# Altium PCB PCB.PcbDoc
Units mm, origin at the board's own origin, x right, y up, seen from the top; angles counter-clockwise.
Board outline 152.4 x 101.6 mm, 2 copper layers (Top Layer, Bottom Layer); 14 components, 15 nets, 57 pads, 0 vias.
Unrouted connection lines stored in the file: 32.
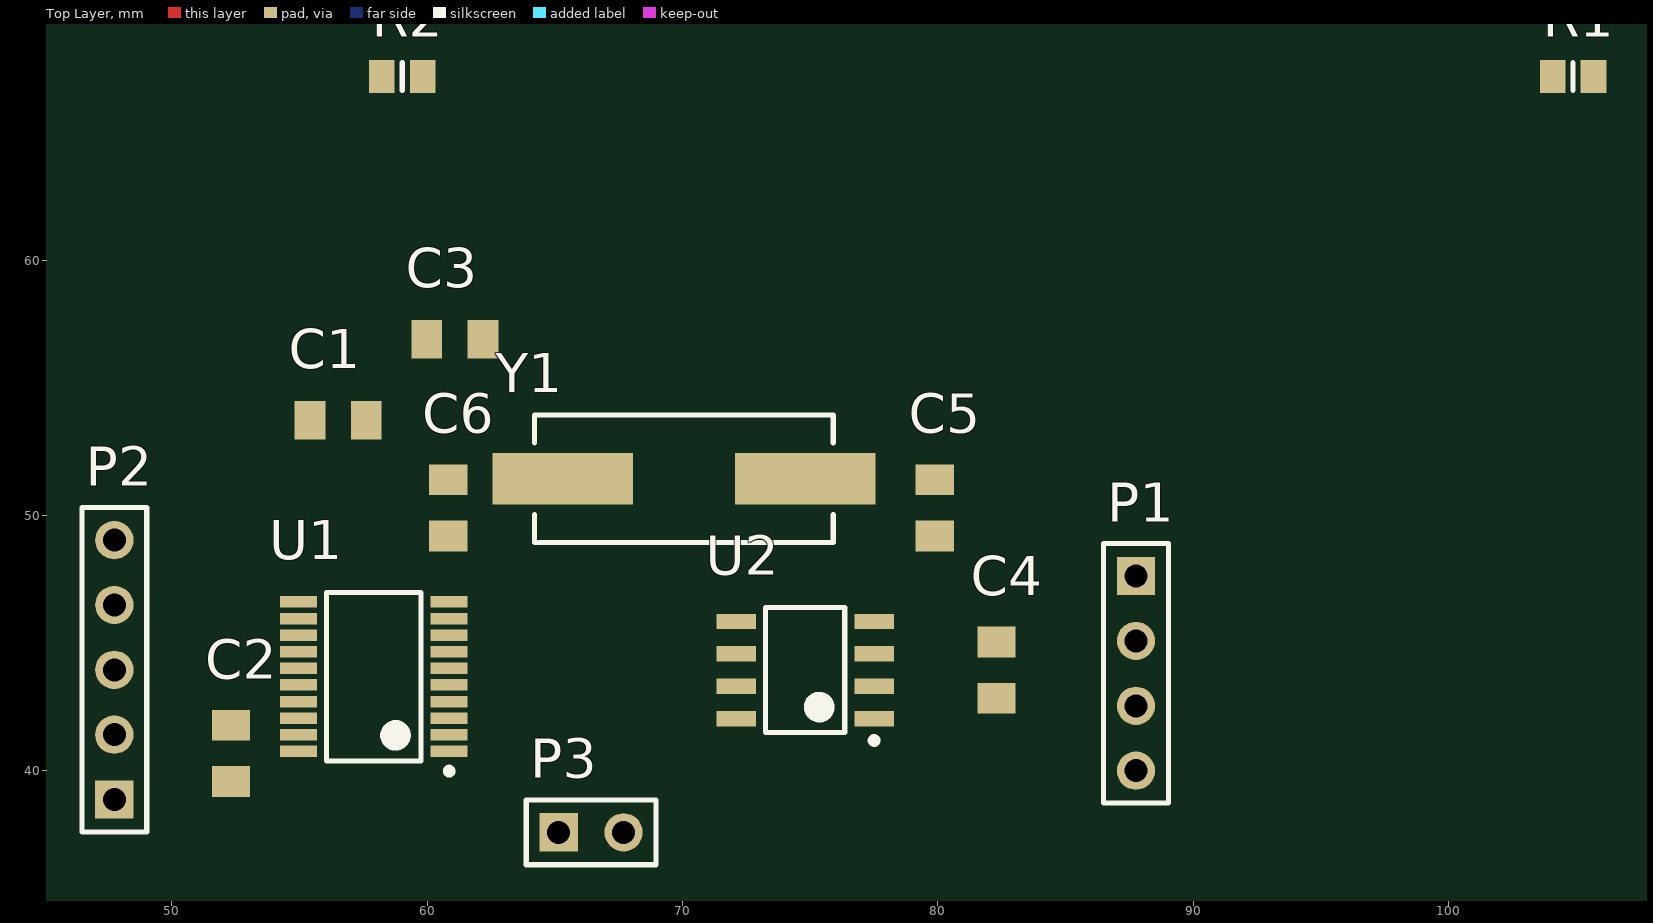
[diagram p0: Top Layer view]
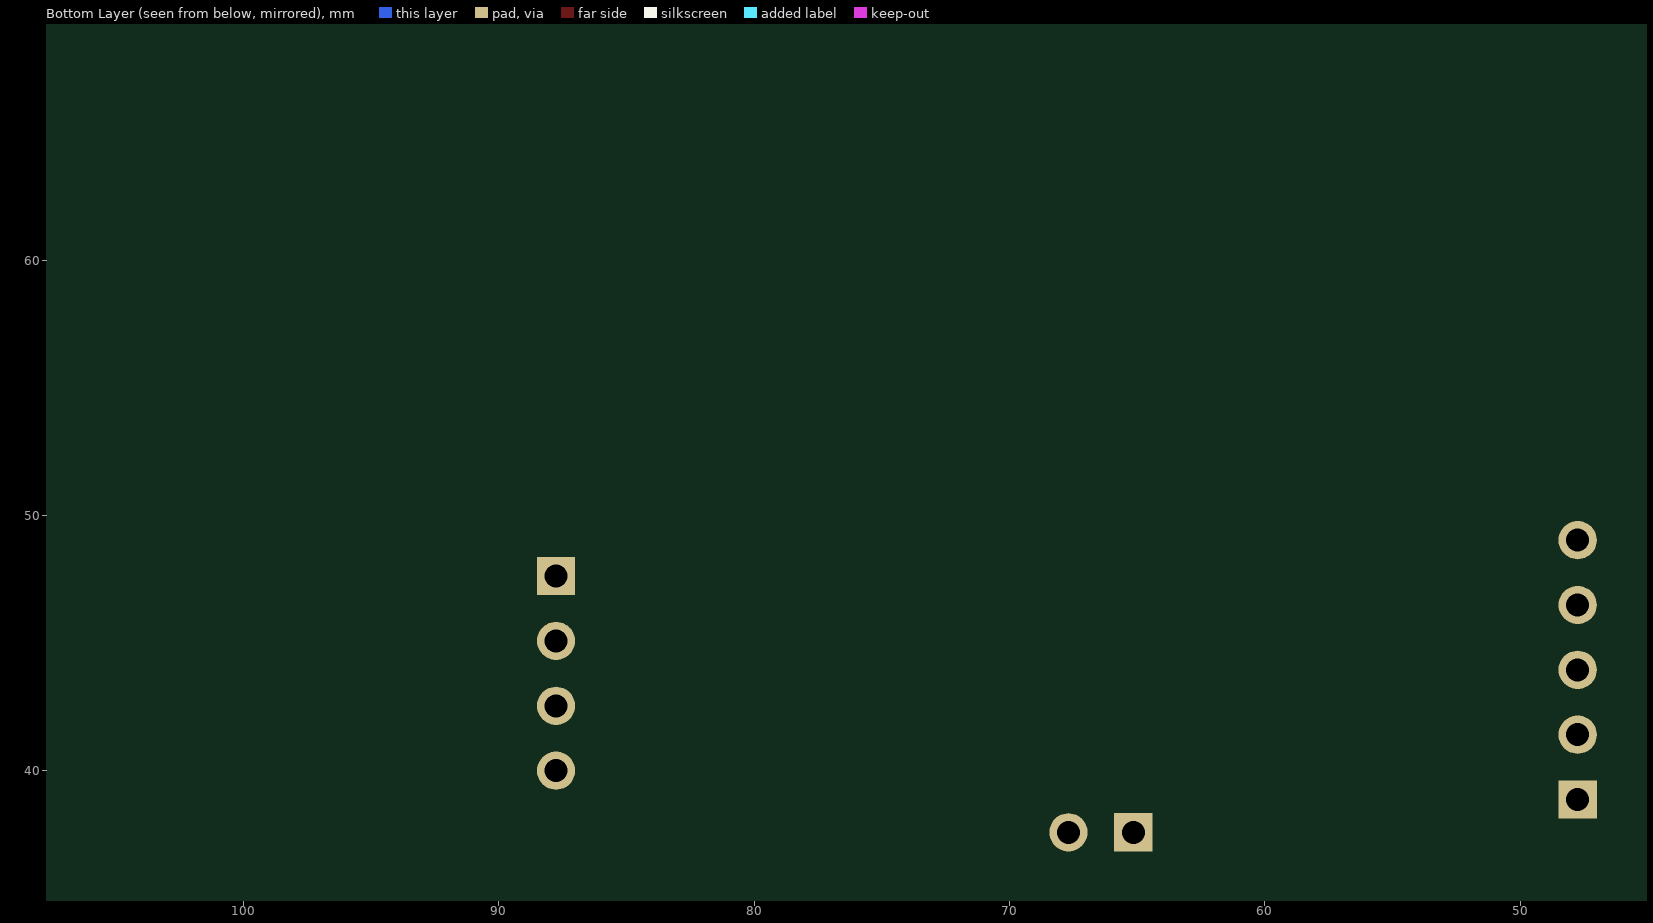
[diagram p1: Bottom Layer view, seen from below]

## Layer stack, top to bottom
Top Solder: solder mask 0.0102, Solder Resist, Dk 3.5
Top Layer: signal copper 0.0356
Dielectric 1: dielectric 0.32, FR-4, Dk 4.8
Bottom Layer: signal copper 0.0356
Bottom Solder: solder mask 0.0102, Solder Resist, Dk 3.5

## Board outline
25.4,25.4 177.8,25.4 177.8,127 25.4,127

## Design rules (kind name [scope] priority, off if disabled: settings)
Clearance [All] p1: gap=0.254 ignorepadtopadclearanceinfootprint=FALSE except(0: Arc-Hole Track-Hole SMDPad-Hole THPad-Hole Via-Hole Fill-Hole Poly-Hole Region-Hole Text-Hole)
PolygonConnect [All] p1: connectstyle=Relief reliefconductorwidth=0.254 reliefentries=4 polygonreliefangle="90 Angle" airgapwidth=0.254
RoomDefinition "Main Schematic" [InComponentClass('Main Schematic')] p1: confinementstyle=ConfineOut formatcopy=TRUE lockcomponents=FALSE outline 20.574,9.779 41.021,9.779 41.021,22.733 20.574,22.733
RoutingVias [All] p1: holewidth=0.711 width=1.27 viastyle="Through Hole" minholewidth=0.711 minwidth=1.27 maxholewidth=0.711 maxwidth=1.27
SolderMaskExpansion [All] p1: expansion=0.102
Width [All] p1: maxlimit=0.254 minlimit=0.254 preferedwidth=0.254
30 further rules are at their usual default settings.

## Components (designator, comment, footprint, x,y, rotation, side; value= is the part's Value field where it differs from the comment)
C1 "Capacitor" CAP0805 56.515,53.721 r0 top value=10uF
C2 "Capacitor" CAP0805 52.324,40.683 r270 top value=100nF
C3 "Capacitor" CAP0805 61.087,56.896 r0 top value=10uF
C4 "Capacitor" CAP0805 82.296,43.942 r270 top value=100nF
C5 "Capacitor" CAP0805 79.883,50.292 r270 top value=22pF
C6 "Capacitor" CAP0805 60.833,50.292 r270 top value=22pF
P1 "Header 4" HDR1X4 87.757,47.625 r270 top
P2 "Header 5" HDR1X5 47.752,38.873 r90 top
P3 "Header 2" HDR1X2 65.151,37.592 r0 top
R1 "Resistor" 6-0805_L 104.873,67.187 r0 top value=10K
R2 "Resistor" 6-0805_L 59.026,67.187 r0 top value=120
U1 "MCP2515" "TSSOP 20-lead 4.4mm" 57.912,43.688 r180 top
U2 "MCP2551" "SOIC 8-LEAD SN" 74.803,43.942 r180 top
Y1 "FOXSDLF/080-20" FOX-HC49SDLF_V 70.053,51.435 r180 top

## Footprints (in the part's own frame and the unit in brackets; to place one, negate y for a bottom-side part, rotate by r counter-clockwise, add the part's x,y. Pads: shape width x height; smd on the part's side, far side on the other; paste and mask are expansions set on the pad)
6-0805_L [mm] "Chip Resistor, Body 2.0x1.2mm, IPC High Density"
  rect 1x1.3 smd: 1(-0.8,0) 2(0.8,0)
  silkscreen extent 0,-0.55 0,0.55, body extent -1.07,-0.7 1.07,0.7, height 0.7
CAP0805 [mm] "Chip Capacitor, 2-Leads, Body 2,00x1,25mm, IPC Low Density"
  rect 1.2x1.5 smd: 1(-1.1,0) 2(1.1,0)
  body extent -1.08,-0.67 1.07,0.67, height 1.45
FOX-HC49SDLF_V [mm] "SMD, 2-Leads, Body 5x11.7mm"
  rect 5.5x2 smd: 1(-4.75,0) 2(4.75,0)
  silkscreen extent -5.85,-2.5 5.85,2.5, body extent -6.15,-2.35 6.15,2.35, height 4.34
HDR1X2 [mm] "Connector; Header; 2 Position"
  rect 1.5x1.5 hole 0.9: 1(0,0)
  round 1.5 hole 0.9: 2(2.54,0)
  silkscreen extent -1.27,-1.27 3.81,1.27
HDR1X4 [mm] "Connector; Header; 4 Position"
  rect 1.5x1.5 hole 0.9: 1(0,0)
  round 1.5 hole 0.9: 2(2.54,0) 3(5.08,0) 4(7.62,0)
  silkscreen extent -1.27,-1.27 8.89,1.27
HDR1X5 [mm] "Connector; Header; 5 Position"
  rect 1.5x1.5 hole 0.9: 1(0,0)
  round 1.5 hole 0.9: 2(2.54,0) 3(5.08,0) 4(7.62,0) 5(10.16,0)
  silkscreen extent -1.27,-1.27 11.43,1.27
"SOIC 8-LEAD SN" [mm] "SOIC, 8-Leads, Body 4.90x3.90mm, Pitch 1.27mm, IPC Low Density"
  rect 1.55x0.6 smd: 1(-2.7,1.905) 2(-2.7,0.635) 3(-2.7,-0.635) 4(-2.7,-1.905) 5(2.7,-1.905) 6(2.7,-0.635) 7(2.7,0.635) 8(2.7,1.905)
  silkscreen extent -2.83,-2.45 1.55,2.88, body extent -3,-2.45 3,2.45, height 1.75
"TSSOP 20-lead 4.4mm" [mm] "TSOP, 20-Leads, Body 6.50x4.40mm, Pitch 0.65mm, IPC Low Density"
  rect 1.45x0.45 smd: 1(-2.95,2.925) 2(-2.95,2.275) 3(-2.95,1.625) 4(-2.95,0.975) 5(-2.95,0.325) 6(-2.95,-0.325) 7(-2.95,-0.975) 8(-2.95,-1.625) 9(-2.95,-2.275) 10(-2.95,-2.925) 11(2.95,-2.925) 12(2.95,-2.275) 13(2.95,-1.625) 14(2.95,-0.975) 15(2.95,-0.325) 16(2.95,0.325) 17(2.95,0.975) 18(2.95,1.625) 19(2.95,2.275) 20(2.95,2.925)
  silkscreen extent -3.08,-3.3 1.85,3.82, body extent -3.2,-3.3 3.2,3.3, height 1.2

## Part data
C1 C3: Package=0805, Tolerance=20%, Voltage=10V
C2 C4 C5 C6: Package=0603, Tolerance=10%, Voltage=16V
P1: "Header, 4-Pin", LatestRevisionDate=17-Jul-2002, LatestRevisionNote="Re-released for DXP Platform.", Publisher="Altium Limited"
P2: "Header, 5-Pin", LatestRevisionDate=17-Jul-2002, LatestRevisionNote="Re-released for DXP Platform.", Publisher="Altium Limited"
P3: "Header, 2-Pin", LatestRevisionDate=17-Jul-2002, LatestRevisionNote="Re-released for DXP Platform.", Publisher="Altium Limited"
R1 R2: Package=0602, Power Rating=1/4W, Tolerance=1%
Y1: library part CMP-2100-03639-1, "Resistance Weld Crystal, 8 MHz, +/- 30 ppm, -20 to 70 degC, 2-Pin SMD, RoHS, Tape and Reel", Case/Package=SMD/SMT, ESR (Equivalent Series Resistance)=80Ohm, Frequency=8MHz, Frequency Stability=50ppm, Frequency Tolerance=30ppm, Load Capacitance=20pF, Manufacturer="FOX Electronics", Max Operating Temperature=70degC, Min Operating Temperature=-20degC, Package Description="2-Pin Surface Mount Device, Body 5 x 11.7 mm", Package Quantity=1000, Package Reference=HC49SDLF, Datasheet URL=http://www.foxonline.com/pdfs/hc49sdlf.pdf, Datasheet Version=42064.0, Depth=5mm, Height=4.5mm, Lead Free=LeadFree, Length=11.7mm, Manufacturer URL=http://www.foxonline.com/, Mount=SurfaceMount, Number of Pins=2, Packaging=TapeandReel, Radiation Hardening=No, REACH SVHC=NoSVHC, RoHSCompliant=True, Series Resistance=80Ohm, Termination=SMD/SMT, Tolerance=50ppm, Width=5mm
U1: ComponentLink1Description=MOUSER, ComponentLink1URL=https://no.mouser.com/ProductDetail/Microchip-Technology/MCP2515-I-SO?qs=KwArPi4cUogGDbGnphOvtQ==
U2: ComponentLink1Description=MCP2551, ComponentLink1URL=https://no.mouser.com/datasheet/2/268/20001667G-1115479.pdf

## Nets (pads, with @x,y where several pads share a name; then routed paths per layer and width w, separated by ;. In a path a pad name is that pad's centre, name@x,y a point inside that pad or via, vN(x,y) a via of type N, cw(c..) or ccw(c..) an arc to the next point about the centre after c; other vN are vias at no path point)
3.3V: C1.1 C2.1 P1.1 R1.2 U1.18
5V: C3.1 C4.1 P1.2 U2.3
CS: P2.1 U1.16
GND: C1.2 C2.2 C3.2 C4.2 C5.2 C6.2 P1.3 P1.4 U1.9 U2.2
INT: P2.5 U1.12
NetC5_1: C5.1 U1.7 Y1.1
NetC6_1: C6.1 U1.8 Y1.2
NetP3_1: P3.1 R2.2 U2.6
NetP3_2: P3.2 R2.1 U2.7
NetR1_1: R1.1 U1.17
NetU1_1: U1.1 U2.1
NetU1_2: U1.2 U2.4
SCK: P2.4 U1.13
SI: P2.3 U1.14
SO: P2.2 U1.15
pads on no net: U1.3 U1.4 U1.5 U1.6 U1.10 U1.11 U1.19 U1.20 U2.5 U2.8